# EAGLE board shield_horiz_b (EAGLE 6.5.0)
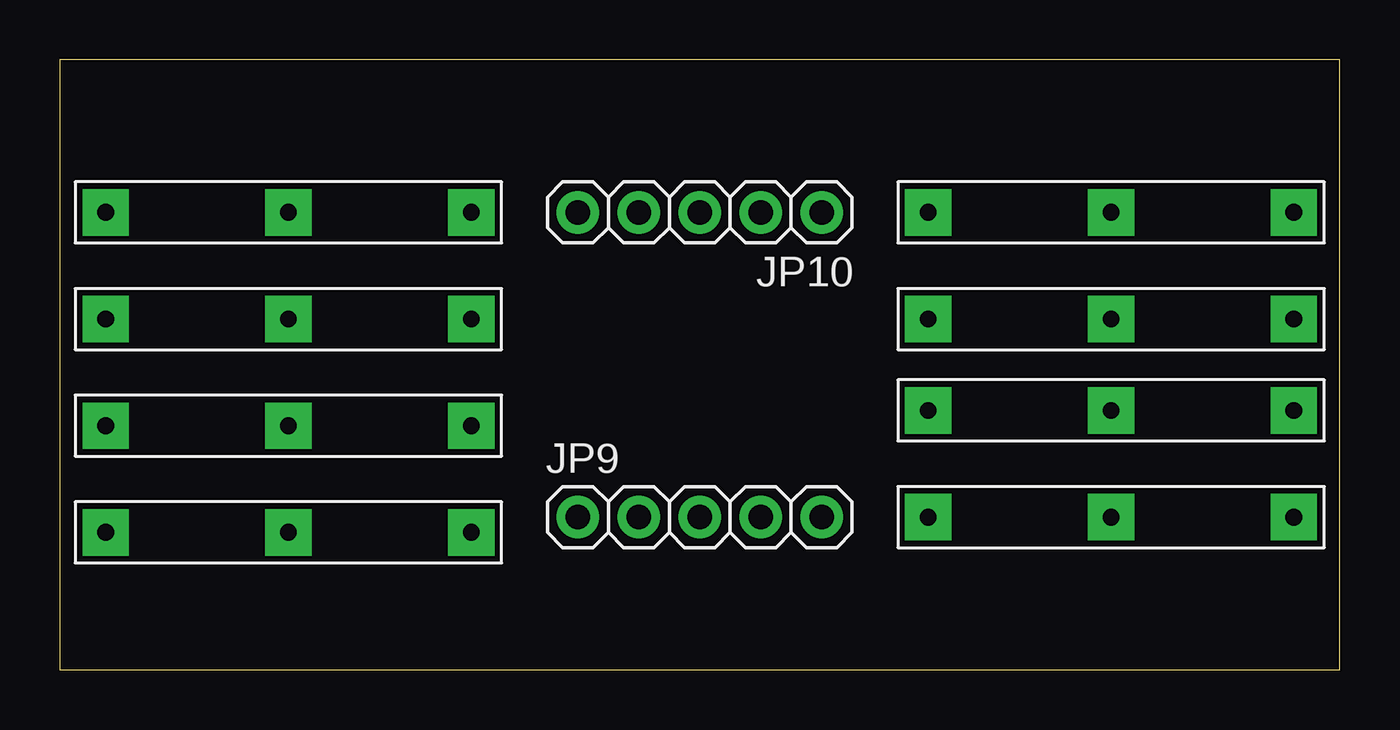
[diagram p0: board, top side]
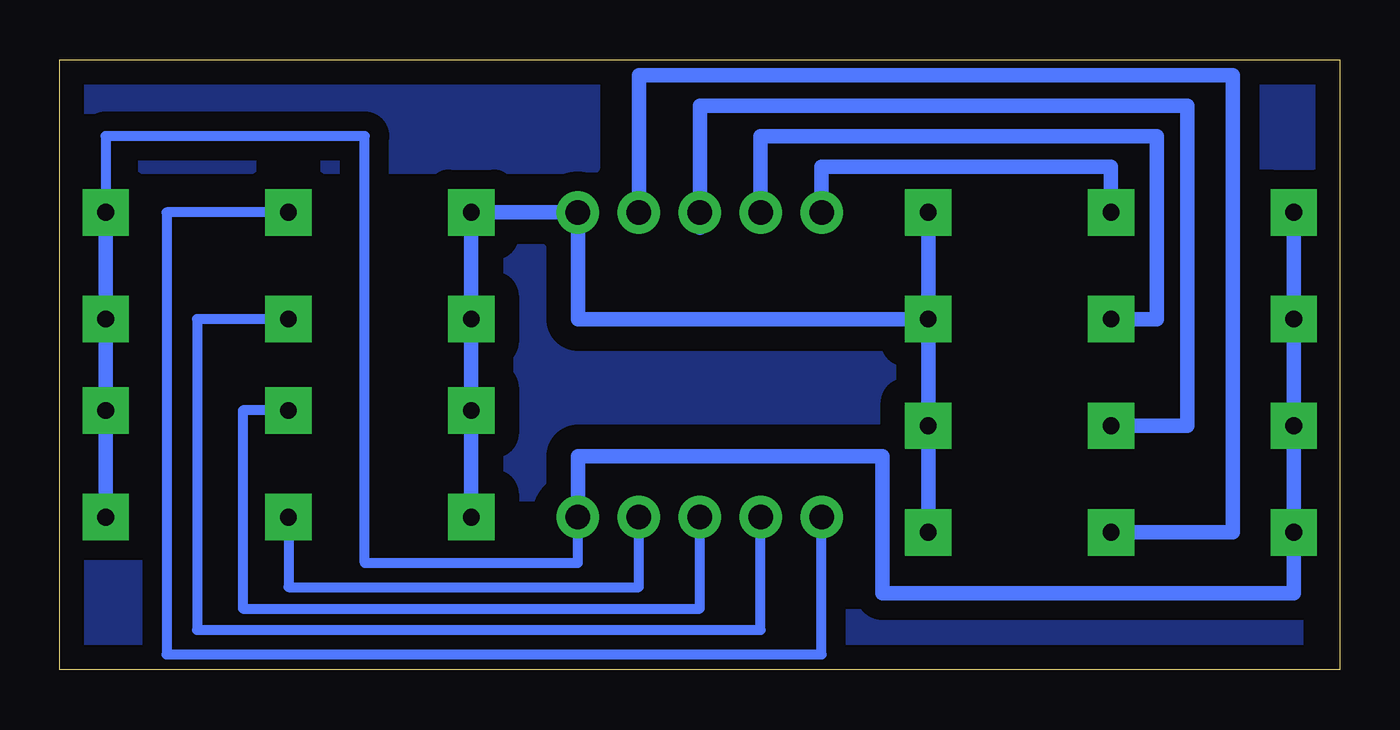
[diagram p1: board, bottom side, seen from below]

Size 53.34 x 25.4 mm. Coordinates in mm from the lower left corner, seen from the top.
Outline: 0,0 53.34,0 53.34,25.4 0,25.4 0,0
Copper layers (1*16): Top 0.035mm / dielectric 1.5mm / Bottom 0.035mm
Design rules "default": minimum track width 10mil, minimum drill 24mil, track to track 8mil, track to pad 8mil, pad to pad 8mil, via to via 8mil, smd to smd 8mil, copper to edge 40mil, drill to drill 8mil, minimum pad ring 10mil, minimum via ring 8mil, stop-mask expansion 4mil, vias tented up to drill 0mil, thermal gap 10mil

## Footprints (pad centres in the part's own frame; a part is rotated, then mirrored left to right if it is on the bottom)
1X03-POTENTIOSHIELD = drill 0.7 pad 1.93 square: 1 -7.62,0; 2 0,0; 3 7.62,0
1X05 = drill 1.016 pad 1.778: 1 -5.08,0; 2 -2.54,0; 3 0,0; 4 2.54,0; 5 5.08,0

## Placement (x,y rotation side)
JP1  [1X03-POTENTIOSHIELD]  43.81,19.05 0 top
JP2  [1X03-POTENTIOSHIELD]  43.81,14.61 0 top
JP3  [1X03-POTENTIOSHIELD]  43.81,10.79 0 top
JP4  [1X03-POTENTIOSHIELD]  43.81,6.35 0 top
JP5  [1X03-POTENTIOSHIELD]  9.53,5.71 180 top
JP6  [1X03-POTENTIOSHIELD]  9.53,10.16 180 top
JP7  [1X03-POTENTIOSHIELD]  9.53,14.61 180 top
JP8  [1X03-POTENTIOSHIELD]  9.53,19.05 180 top
JP9  [1X05]  26.67,6.35 0 top
JP10  [1X05]  26.67,19.05 180 top

## Library data of the parts
JP1-JP10 = manticore-lib

## Nets
GND: JP1.1 JP2.1 JP3.1 JP4.1 JP5.1 JP6.1 JP7.1 JP8.1 JP10.1
N$1: JP1.2 JP9.1
N$2: JP2.2 JP9.2
N$3: JP3.2 JP9.3
N$4: JP4.2 JP9.4
N$5: JP5.2 JP10.2
N$6: JP6.2 JP10.3
N$7: JP7.2 JP10.4
N$8: JP8.2 JP10.5
VCC: JP1.3 JP2.3 JP3.3 JP4.3 JP5.3 JP6.3 JP7.3 JP8.3 JP9.5

## Tracks (layer width: path | path; a pad name or v marks a point on that pad's centre or on a via)
GND
  Bottom 0.61: JP8.1 JP7.1 | JP7.1 JP6.1 JP5.1 | JP4.1 JP3.1 JP2.1 JP1.1 JP10.1 31.75,14.61 JP7.1
N$1
  Bottom 0.406: JP1.2 48.9,19.05 48.9,0.64 21.59,0.64 JP9.1
N$2
  Bottom 0.406: JP2.2 47.62,14.61 47.62,1.65 24.13,1.65 JP9.2
N$3
  Bottom 0.406: JP3.2 45.72,10.79 45.72,2.54 26.67,2.54 JP9.3
N$4
  Bottom 0.406: JP4.2 43.81,3.43 29.21,3.43 JP9.4
N$5
  Bottom 0.61: JP5.2 4.45,5.71 4.45,24.77 29.21,24.77 JP10.2
N$6
  Bottom 0.61: JP6.2 6.35,10.16 6.35,23.5 26.67,23.5 JP10.3 26.67,18.41
N$7
  Bottom 0.61: JP7.2 7.62,14.61 7.62,22.23 24.13,22.23 JP10.4
N$8
  Bottom 0.61: JP8.2 9.53,20.95 21.59,20.95 JP10.5
N$9
  pour Bottom (isolate 0.813): 1.91,3.17 1.91,0 21.59,0 21.59,3.81 19.05,3.81 19.05,3.17
N$10
  pour Bottom (isolate 0.813): 0.64,24.77 0.64,20.95 3.81,20.95 3.81,24.77
N$11
  pour Bottom (isolate 0.813): 49.53,4.45 49.53,0 53.34,0 53.34,4.45
N$19
  pour Bottom (isolate 0.813): 31.11,25.4 31.11,20.95 52.7,20.95 52.7,25.4
N$20
  pour Bottom (isolate 1.016): 17.14,13.97 17.14,9.53 31.75,9.53 31.75,4.45 35.56,4.45 36.2,5.08 36.2,19.05 31.75,19.05 31.75,14.61 17.78,14.61
VCC
  Bottom 0.406: JP1.3 51.44,22.23 40.64,22.23 40.64,4.45 31.75,4.45 JP9.5
  Bottom 0.61: JP8.3 JP7.3 JP6.3 JP5.3 1.91,3.17 19.05,3.17 19.05,8.89 31.75,8.89 JP9.5 | JP1.3 JP2.3 JP3.3 JP4.3